# EAGLE board board (EAGLE 5.11)
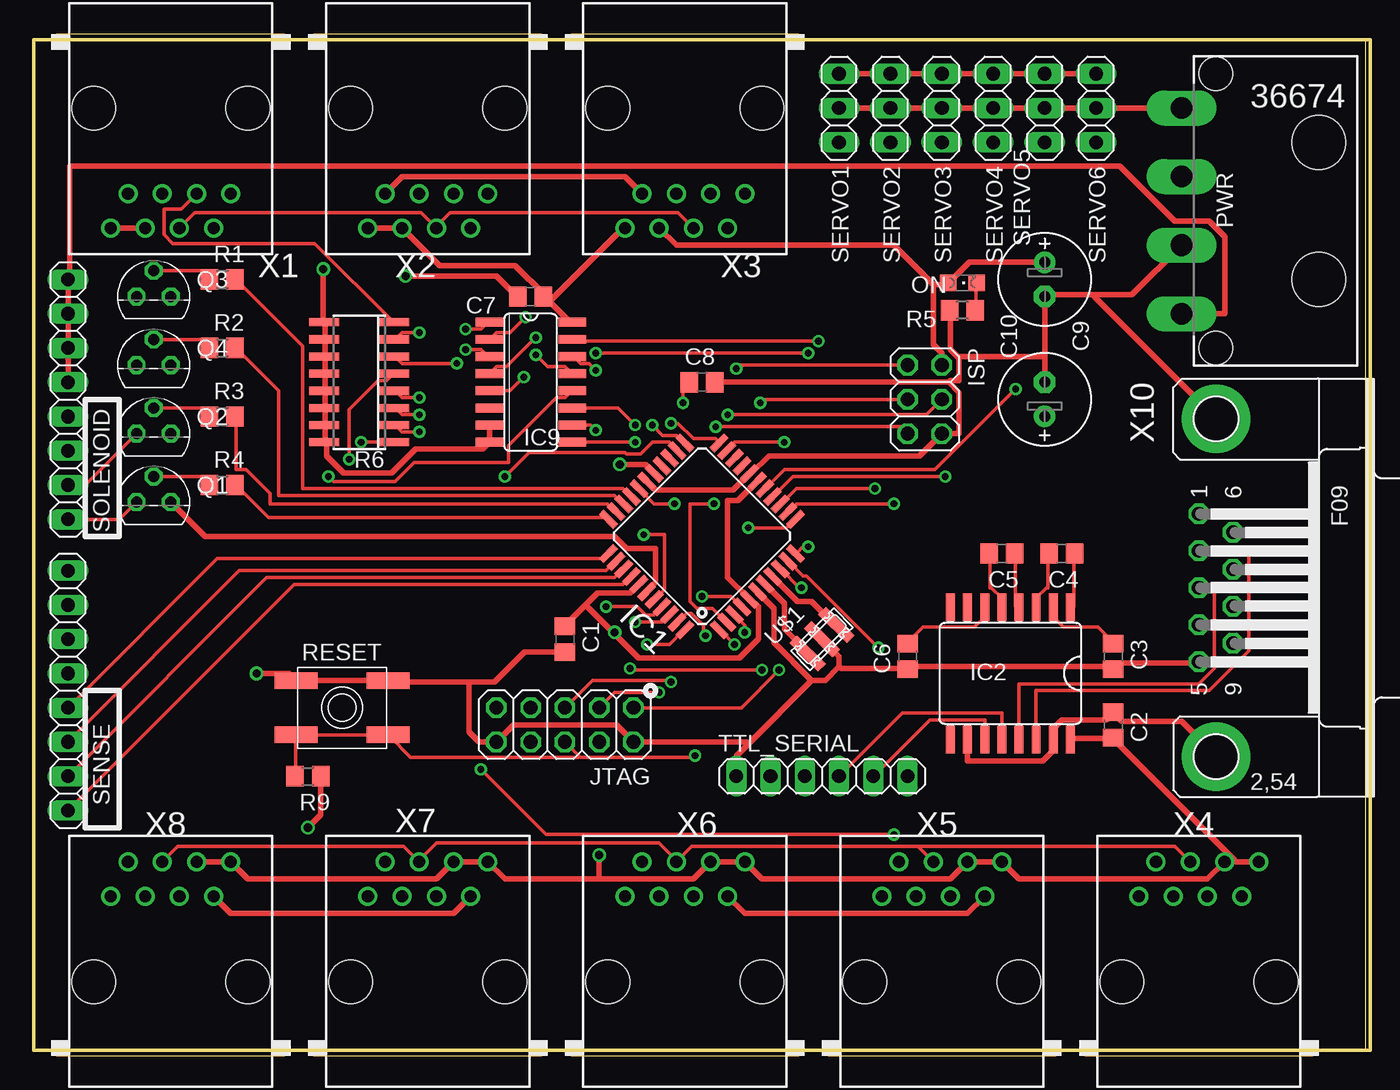
[diagram p0: board, top side]
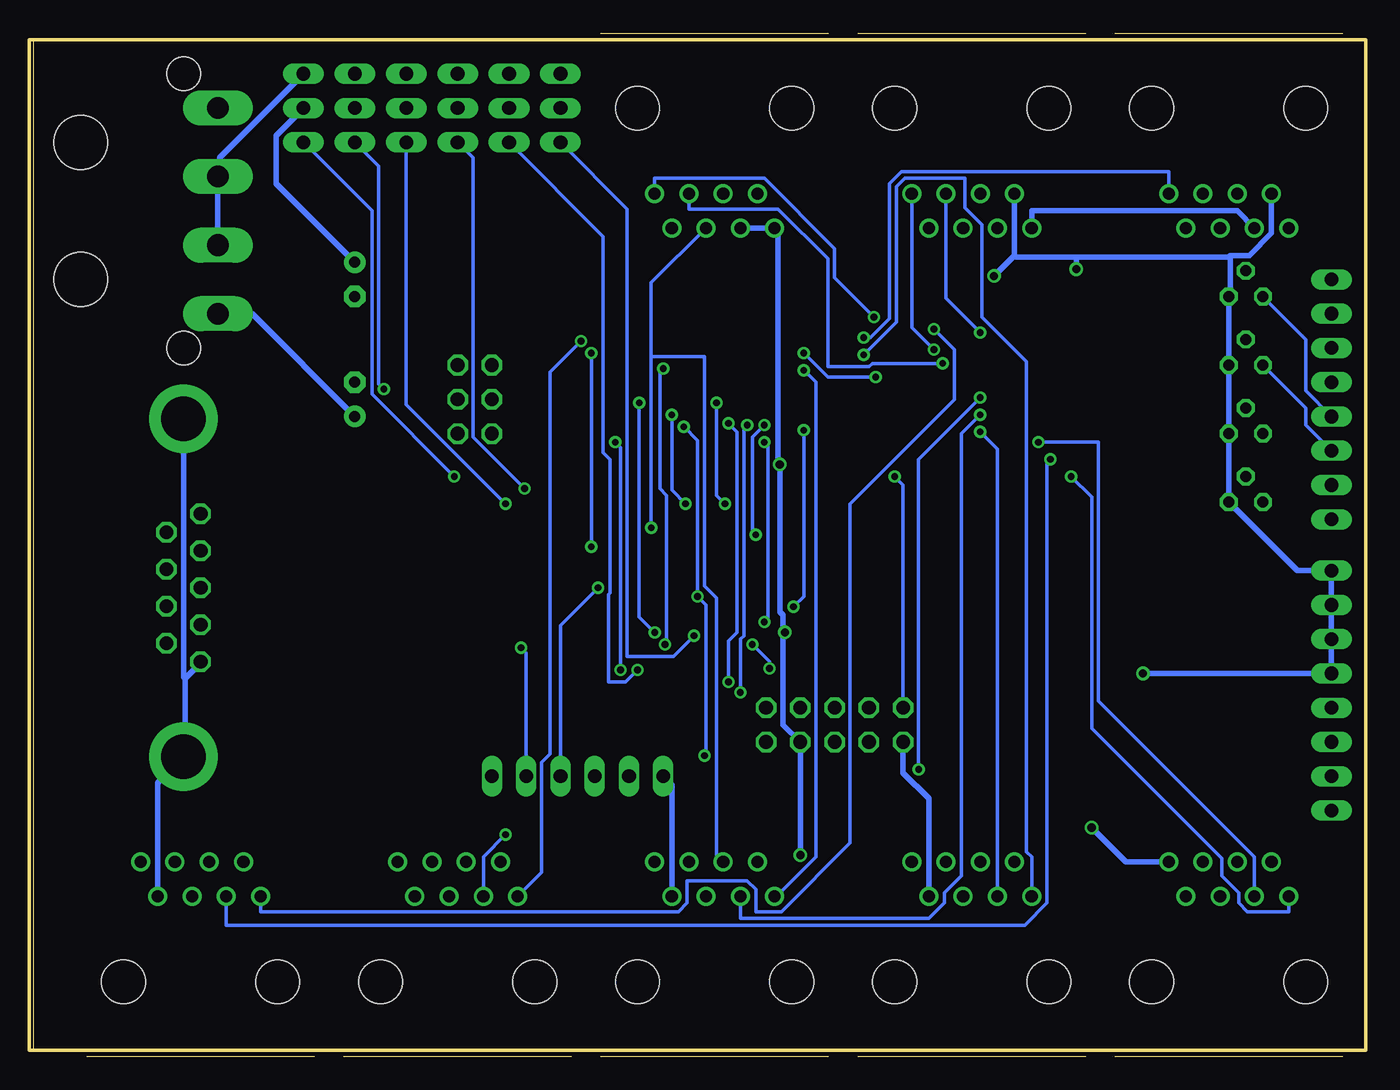
[diagram p1: board, bottom side, seen from below]

Size 98.73 x 74.92 mm. Coordinates in mm from the lower left corner, seen from the top.
Outline: 0,0 98.73,0 98.73,74.92 0,74.92 0,0
Copper layers (1*16): Top 0.035mm / dielectric 1.5mm / Bottom 0.035mm
Design rules "default *": minimum track width 8mil, minimum drill 16mil, track to track 1mil, track to pad 1mil, pad to pad 1mil, via to via 1mil, smd to smd 1mil, copper to edge 40mil, drill to drill 8mil, minimum pad ring 10mil, minimum via ring 8mil, stop-mask expansion 4mil, vias tented up to drill 0.61mm, thermal gap 10mil
Net classes: 0 default: width 0.254 mm, drill 0.5 mm, clearance 0.254 mm; 1 pwr12: width 0.406 mm, drill 0.6 mm, clearance 0.254 mm
vRestrict: area 22.4,44.5 to 23.1,54.4; area 24.9,44.5 to 25.9,54.4; area 34.8,44.5 to 35.8,54.6; area 37.8,44.5 to 38.9,54.6; area 42.9,37.3 to 50,44.5; area 43.2,31.8 to 50.3,38.6; area 48.8,31.8 to 55.9,38.9; area 49,37.3 to 55.9,44.5; area 67.3,30.2 to 77.7,31.5; area 67.3,23.9 to 77.7,25.4
Milling: 4 lines

## Footprints (pad centres in the part's own frame; a part is rotated, then mirrored left to right if it is on the bottom)
C0805 = smd 1.3 x 1.5: 1 -0.95,0; 2 0.95,0
E2,5-7 = drill 0.813 pad 1.6 round: + -1.27,0 | drill 0.813 pad 1.6 octagon: - 1.27,0
TQFP44 = smd 1.5 x 0.5: 1 -5.8,4; 2 -5.8,3.2; 3 -5.8,2.4; 4 -5.8,1.6; 5 -5.8,0.8; 6 -5.8,0; 7 -5.8,-0.8; 8 -5.8,-1.6; 9 -5.8,-2.4; 10 -5.8,-3.2; 11 -5.8,-4; 23 5.8,-4; 24 5.8,-3.2; 25 5.8,-2.4; 26 5.8,-1.6; 27 5.8,-0.8; 28 5.8,0; 29 5.8,0.8; 30 5.8,1.6; 31 5.8,2.4; 32 5.8,3.2; 33 5.8,4 | smd 0.5 x 1.5: 12 -4,-5.8; 13 -3.2,-5.8; 14 -2.4,-5.8; 15 -1.6,-5.8; 16 -0.8,-5.8; 17 0,-5.8; 18 0.8,-5.8; 19 1.6,-5.8; 20 2.4,-5.8; 21 3.2,-5.8; 22 4,-5.8; 34 4,5.8; 35 3.2,5.8; 36 2.4,5.8; 37 1.6,5.8; 38 0.8,5.8; 39 0,5.8; 40 -0.8,5.8; 41 -1.6,5.8; 42 -2.4,5.8; 43 -3.2,5.8; 44 -4,5.8
SO16L = smd 0.66 x 2.032: 1 -4.445,-4.902; 2 -3.175,-4.902; 3 -1.905,-4.902; 4 -0.635,-4.902; 5 0.635,-4.902; 6 1.905,-4.902; 7 3.175,-4.902; 8 4.445,-4.902; 9 4.445,4.902; 10 3.175,4.902; 11 1.905,4.902; 12 0.635,4.902; 13 -0.635,4.902; 14 -1.905,4.902; 15 -3.175,4.902; 16 -4.445,4.902
SO16 = smd 0.66 x 2.032: 1 -4.445,-3.073; 2 -3.175,-3.073; 3 -1.905,-3.073; 4 -0.635,-3.073; 5 0.635,-3.073; 6 1.905,-3.073; 7 3.175,-3.073; 8 4.445,-3.073; 9 4.445,3.073; 10 3.175,3.073; 11 1.905,3.073; 12 0.635,3.073; 13 -0.635,3.073; 14 -1.905,3.073; 15 -3.175,3.073; 16 -4.445,3.073
2X03 = drill 1.016 octagon: 1 -2.54,-1.27; 2 -2.54,1.27; 3 0,-1.27; 4 0,1.27; 5 2.54,-1.27; 6 2.54,1.27
2X05 = drill 1.016 octagon: 1 -5.08,-1.27; 2 -5.08,1.27; 3 -2.54,-1.27; 4 -2.54,1.27; 5 0,-1.27; 6 0,1.27; 7 2.54,-1.27; 8 2.54,1.27; 9 5.08,-1.27; 10 5.08,1.27
CHIPLED_0805 = smd 1.2 x 1.2: A 0,-1.05; C 0,1.05
9090-4R = drill 1.6 pad 2.6 long: 1 -7.62,-6.35; 2 -2.54,-6.35; 3 2.54,-6.35; 4 7.62,-6.35 | hole 4: -5.08,3.81; 5.08,3.81 | hole 2.5: -10.16,-3.81; 10.16,-3.81
TO92 = drill 0.813 octagon: 1 1.27,0; 2 0,1.905; 3 -1.27,0
R0805 = smd 1.3 x 1.5: 1 -0.95,0; 2 0.95,0
SO16' = smd 0.6 x 2.2: 1 -4.445,-2.6; 2 -3.175,-2.6; 3 -1.905,-2.6; 4 -0.635,-2.6; 5 0.635,-2.6; 6 1.905,-2.6; 7 3.175,-2.6; 8 4.445,-2.6; 9 4.445,2.6; 10 3.175,2.6; 11 1.905,2.6; 12 0.635,2.6; 13 -0.635,2.6; 14 -1.905,2.6; 15 -3.175,2.6; 16 -4.445,2.6
EVQ-Q2 = smd 3.2 x 1.2: A -3.4,-2; A' 3.4,-2; B -3.4,2; B' 3.4,2
1X08 = drill 1.016 long: 1 -8.89,0; 2 -6.35,0; 3 -3.81,0; 4 -1.27,0; 5 1.27,0; 6 3.81,0; 7 6.35,0; 8 8.89,0
1X03 = drill 1.016 long: 1 -2.54,0; 2 0,0; 3 2.54,0
1X06 = drill 1.016 long: 1 -6.35,0; 2 -3.81,0; 3 -1.27,0; 4 1.27,0; 5 3.81,0; 6 6.35,0
CSTCR-G = smd 0.8 x 3: 1 -1.5,0; 2 0,0; 3 1.5,0
RJ45-NO-SHIELD = drill 0.9 pad 1.4 round: 1 -4.445,6.35; 2 -3.175,8.89; 3 -1.905,6.35; 4 -0.635,8.89; 5 0.635,6.35; 6 1.905,8.89; 7 3.175,6.35; 8 4.445,8.89 | hole 3.251: -5.715,0; 5.715,0
F09HP = drill 1.016 octagon: 1 -5.486,-1.27; 2 -2.743,-1.27; 3 0,-1.27; 4 2.743,-1.27; 5 5.486,-1.27; 6 -4.115,1.27; 7 -1.372,1.27; 8 1.372,1.27; 9 4.115,1.27 | drill 3.302 pad 5.08 round: G1 -12.522,0; G2 12.522,0

## Placement (x,y rotation side)
C1  .1uF  [C0805]  39.37,30.48 270 top
C2  .1uF  [C0805]  80.01,24.13 90 top
C3  1uF  [C0805]  80.01,29.21 270 top
C4  1uF  [C0805]  76.2,36.83 180 top
C5  1uF  [C0805]  71.75,36.83 180 top
C6  1uF  [C0805]  64.77,29.21 90 top
C7  .1uF  [C0805]  36.83,55.88 180 top
C8  .1uF  [C0805]  49.53,49.53 0 top
C9  [E2,5-7]  74.93,57.15 270 top
C10  [E2,5-7]  74.93,48.26 90 top
IC1  MEGA164P/324P/644P-AU  [TQFP44]  49.53,38.1 135 top
IC2  MAX232ECWE  [SO16L]  72.39,27.94 180 top
IC9  74LS151D  [SO16]  36.83,49.53 270 top
ISP  [2X03]  66.04,48.26 270 top
JTAG  [2X05]  39.37,24.13 180 top
ON  [CHIPLED_0805]  68.83,56.9 270 top
PWR  9090-4R  [9090-4R]  91.44,62.23 270 top
Q1  BS170  [TO92]  8.89,40.64 0 top
Q2  BS170  [TO92]  8.89,45.72 0 top
Q3  BS170  [TO92]  8.89,55.88 0 top
Q4  BS170  [TO92]  8.89,50.8 0 top
R1  [R0805]  13.97,57.15 0 top
R2  [R0805]  13.97,52.07 0 top
R3  [R0805]  13.97,46.99 0 top
R4  [R0805]  13.97,41.91 0 top
R5  [R0805]  68.83,54.86 180 top
R6  [SO16']  24.13,49.53 90 top
R9  [R0805]  20.32,20.32 0 top
RESET  EVQQ2  [EVQ-Q2]  22.86,25.4 0 top
SENSE  [1X08]  2.54,26.67 90 top
SERVO1  [1X03]  59.69,69.85 90 top
SERVO2  [1X03]  63.5,69.85 90 top
SERVO3  [1X03]  67.31,69.85 90 top
SERVO4  [1X03]  71.12,69.85 90 top
SERVO5  [1X03]  74.93,69.85 90 top
SERVO6  [1X03]  78.74,69.85 90 top
SOLENOID  [1X08]  2.54,48.26 90 top
TTL_SERIAL  [1X06]  58.42,20.32 0 top
U$1  [CSTCR-G]  58.42,30.48 45 top
X1  RJ45-6L-B  [RJ45-NO-SHIELD]  10.16,69.85 180 top
X2  RJ45-6L-B  [RJ45-NO-SHIELD]  29.21,69.85 180 top
X3  RJ45-6L-B  [RJ45-NO-SHIELD]  48.26,69.85 180 top
X4  RJ45-6L-B  [RJ45-NO-SHIELD]  86.36,5.08 0 top
X5  RJ45-6L-B  [RJ45-NO-SHIELD]  67.31,5.08 0 top
X6  RJ45-6L-B  [RJ45-NO-SHIELD]  48.26,5.08 0 top
X7  RJ45-6L-B  [RJ45-NO-SHIELD]  29.21,5.08 0 top
X8  RJ45-6L-B  [RJ45-NO-SHIELD]  10.16,5.08 0 top
X10  [F09HP]  87.63,34.29 270 top

## Library data of the parts
C1-C10 R1-R5 R9 = rcl
IC1 = avr-5
IC2 = maxim; MF: MAXIM; MPN: MAX232ECWE+; OC_FARNELL: 9724435; OC_NEWARK: 67K4440
IC9 = 74xx-us
ISP JTAG SENSE SERVO1-SERVO6 SOLENOID TTL_SERIAL = pinhead
ON = led
PWR = con-thomas-betts; OC_FARNELL: unknown; OC_NEWARK: unknown
Q1-Q4 = Chris_parts
R6 = resistor-bourns; OC_FARNELL: unknown; OC_NEWARK: unknown
RESET U$1 = adafruit
X1-X8 = con-tycoelectronics; MPN: RJ45-6L-B; OC_FARNELL: unknown; OC_NEWARK: 16R6090
X10 = con-subd; OC_FARNELL: unknown; OC_NEWARK: unknown

## Nets
+5V [pwr12]: C1.1 C2.1 C7.1 C9.+ IC1.5 IC1.17 IC1.27 IC1.38 IC2.16 IC9.16 ISP.2 JTAG.4 ON.A PWR.1 R9.2 SERVO1.2 SERVO2.2 SERVO3.2 SERVO4.2 SERVO5.2 SERVO6.2 X1.6 X1.8 X2.6 X2.8 X3.6 X3.8 X4.6 X4.8 X5.6 X5.8 X6.6 X6.8 X7.6 X7.8 X8.6 X8.8
+12V [pwr12]: C10.+ PWR.4 SOLENOID.5 SOLENOID.6 SOLENOID.7 SOLENOID.8
EIA232RX1: IC2.13 X10.3
EIA232TX1: IC2.14 X10.2
GND [pwr12]: C1.2 C2.2 C3.2 C6.1 C7.2 C8.2 C9.- C10.- IC1.6 IC1.18 IC1.28 IC1.39 IC2.10 IC2.15 IC9.7 IC9.8 ISP.6 JTAG.2 JTAG.10 PWR.2 PWR.3 Q1.1 Q2.1 Q3.1 Q4.1 R5.2 R6.9 R6.10 R6.11 R6.12 R6.13 R6.14 R6.15 R6.16 RESET.B RESET.B' SENSE.5 SENSE.6 SENSE.7 SENSE.8 SERVO1.3 SERVO2.3 SERVO3.3 SERVO4.3 SERVO5.3 SERVO6.3 TTL_SERIAL.1 U$1.2 X1.7 X2.7 X3.7 X4.7 X5.7 X6.7 X7.7 X8.7 X10.5 X10.G1 X10.G2
LFSELA: IC1.40 IC9.11
LFSELB: IC1.41 IC9.10
LFSELC: IC1.42 IC9.9
MISO: IC1.1 ISP.1
MOSI: IC1.2 ISP.4
N$1: IC1.7 U$1.1
N$2: IC1.8 U$1.3
N$3: C4.2 IC2.3
N$4: C4.1 IC2.1
N$5: C5.1 IC2.4
N$6: C5.2 IC2.5
N$7: C3.1 IC2.2
N$8: C6.2 IC2.6
N$9: R6.8 X1.3
N$10: R6.5 X4.3
N$11: R6.7 X2.3
N$12: R6.4 X5.3
N$13: R6.6 X3.3
N$14: R6.3 X6.3
N$15: R6.2 X7.3
N$16: R6.1 X8.3
N$17: C8.1 IC1.29
N$18: IC1.30 R1.2
N$19: Q2.2 R3.1
N$20: Q4.2 R2.1
N$21: Q3.2 R1.1
N$22: Q1.3 SOLENOID.1
N$23: Q2.3 SOLENOID.2
N$24: Q3.3 SOLENOID.4
N$25: Q4.3 SOLENOID.3
N$26: IC1.31 R2.2
N$27: IC1.32 R3.2
N$28: IC1.33 R4.2
N$29: Q1.2 R4.1
N$30: IC1.37 SENSE.1
N$31: ON.C R5.1
N$32: IC1.36 SENSE.2
N$33: IC1.35 SENSE.3
N$34: IC1.34 SENSE.4
RST: IC1.4 ISP.5 JTAG.6 R9.1 RESET.A RESET.A'
RX0: IC1.9 IC2.12 TTL_SERIAL.4
RX1: IC1.11 IC9.5
RX1A: IC9.4 X1.1
RX1B: IC9.3 X2.1
RX1C: IC9.2 X3.1
RX1D: IC9.1 X4.1
RX1E: IC9.15 X5.1
RX1F: IC9.14 X6.1
RX1G: IC9.13 X7.1
RX1H: IC9.12 X8.1
SCK: IC1.3 ISP.3
SERVO1: IC1.43 SERVO1.1
SERVO2: IC1.44 SERVO2.1
SERVO3: IC1.14 SERVO3.1
SERVO4: IC1.13 SERVO4.1
SERVO5: IC1.16 SERVO5.1
SERVO6: IC1.15 SERVO6.1
TCK: IC1.21 JTAG.1
TDI: IC1.24 JTAG.9
TDO: IC1.23 JTAG.3
TMS: IC1.22 JTAG.5
TX0: IC1.10 IC2.11 TTL_SERIAL.5
TX1: IC1.12 X1.4 X2.4 X3.4 X4.4 X5.4 X6.4 X7.4 X8.4

## Tracks (layer width: path | path; a pad name or v marks a point on that pad's centre or on a via)
+5V  (via drill 0.6)
  Top 0.406: IC2.16 76.83,23.11 80.01,23.11 C2.1 80.14,22.99 89.03,14.1 89.03,13.97 | 89.03,13.97 X4.8 | 89.03,13.97 X4.6 87,12.7 73.03,12.7 X5.8 X5.6 67.94,12.7 53.98,12.7 X6.8 X6.6 48.9,12.7 41.91,12.7 | X8.6 X8.8 15.88,12.7 29.84,12.7 X7.6 X7.8 34.92,12.7 41.91,12.7 | C9.+ 69.34,58.42 67.82,56.9 ON.A 67.69,56.77 66.67,56.77 | ISP.2 67.31,51.69 66.67,52.32 66.67,56.77 | SERVO1.2 SERVO2.2 SERVO3.2 SERVO4.2 SERVO5.2 SERVO6.2 PWR.1 | 40.89,33.02 41.78,33.91 44.2,33.91 44.83,34.54 IC1.38 | 40.89,33.02 39.37,31.5 C1.1 | IC1.17 52.2,40.77 51.44,40.77 51.44,35.05 52.96,33.53 IC1.5 53.21,33.4 53.72,32.89 53.72,30.48 52.32,29.08 44.83,29.08 42.99,30.92 | 42.99,30.92 40.89,33.02 | X1.6 X1.8 | X2.8 X2.6 30.1,58.17 35.69,58.17 37.85,56.01 C7.1 | C7.1 37.85,55.88 39.75,53.98 IC9.16 | v43.43,43.43 45.34,43.43 45.97,42.8 IC1.27 | X3.8 43.69,60.96 38.35,55.63 C7.1 | v43.05,30.99 42.99,30.92 | X3.6 47.62,59.69 63.75,59.69 66.67,56.77 | 41.91,12.7 v41.91,14.48 | R9.2 21.27,17.46 v20.32,16.51
  Bottom 0.406: C9.+ 80.77,64.26 80.77,67.82 SERVO6.2 | X1.6 9.53,62.23 24.77,62.23 X2.8 | X3.6 X3.8 43.56,60.71 43.56,43.56 v43.43,43.43 43.43,32.51 43.18,32.26 43.18,30.99 | 43.18,30.99 43.18,24.13 JTAG.4 v41.91,14.48 | 43.18,30.99 v43.05,30.99 | v20.32,16.51 17.78,13.97 X8.8
+12V
  Top 0.406: SOLENOID.5 SOLENOID.6 SOLENOID.7 SOLENOID.8 2.67,57.28 2.67,65.53 80.52,65.53 84.58,61.47 87.12,61.47 88.27,60.33 88.27,54.61 PWR.4
  Bottom 0.406: C10.+ 82.55,54.61 PWR.4
EIA232RX1
  Top 0.254: X10.3 87.5,34.29 87.5,28.32 86.36,27.18 73.03,27.18 IC2.13
EIA232TX1
  Top 0.254: IC2.14 74.3,26.67 87.12,26.67 90.04,29.59 90.04,36.96 86.36,36.96 X10.2
GND  (via drill 0.6)
  Top 0.406: U$1.2 59.69,29.21 59.69,28.45 | 59.69,28.45 58.67,27.43 57.66,27.43 | 57.66,27.43 54.86,30.23 54.86,32.77 IC1.6 | v27.56,57.4 34.29,57.4 35.81,55.88 C7.2 | X3.7 43.81,64.77 27.3,64.77 X2.7 | IC9.7 33.78,46.35 33.78,45.09 IC9.8 33.66,44.96 33.27,44.58 28.32,44.58 26.54,42.8 22.99,42.8 21.72,44.07 21.72,44.96 R6.16 21.59,45.09 21.59,46.35 R6.15 21.59,46.48 21.59,47.62 R6.14 21.59,47.75 21.59,48.9 R6.13 21.59,49.02 21.59,50.16 R6.12 21.59,50.29 21.59,51.44 R6.11 21.59,51.56 21.59,52.7 R6.10 21.59,52.83 21.59,53.98 R6.9 21.46,54.1 v21.46,57.91 | SERVO1.3 SERVO2.3 SERVO3.3 SERVO4.3 SERVO5.3 SERVO6.3 | 74.93,51.44 C9.- 75.06,56.01 78.61,56.01 | 74.93,51.44 C10.- | IC1.28 45.47,42.16 46.1,41.53 51.82,41.53 52.96,42.67 IC1.18 53.21,42.8 54.48,44.07 65.66,44.07 ISP.6 68.58,45.72 68.58,48.77 67.82,49.53 | 67.82,49.53 C8.2 | 68.58,51.31 67.94,51.94 67.94,54.86 R5.2 | 68.58,51.31 68.58,49.66 67.94,49.66 67.82,49.53 | 74.93,51.44 68.71,51.44 68.58,51.31 | PWR.3 81.41,56.01 78.61,56.01 | X10.G1 87.63,46.86 78.61,55.88 78.61,56.01 | X8.7 14.61,10.16 31.11,10.16 X7.7 | IC2.10 69.22,21.46 74.8,21.46 75.56,22.23 IC2.15 75.56,23.88 76.2,24.51 79.5,24.51 80.01,25.02 C2.2 80.14,24.89 80.64,24.38 85.09,24.38 87.63,21.84 X10.G2 | X10.5 86.36,28.7 80.39,28.7 80.01,28.32 C3.2 79.88,28.45 64.9,28.45 C6.1 64.77,28.32 59.82,28.32 59.69,28.45 | X5.7 69.22,10.16 52.7,10.16 X6.7 | 52.96,22.73 52.07,21.84 TTL_SERIAL.1 | 52.96,22.73 57.66,27.43 | 52.96,22.73 52.83,22.86 JTAG.2 43.18,24.13 35.56,24.13 JTAG.10 33.02,22.86 32.26,23.62 32.26,27.3 | v16.51,27.94 18.92,27.94 RESET.B 19.56,27.43 26.16,27.43 RESET.B' 26.42,27.3 32.26,27.3
  Top 0.406: Q1.1 12.7,38.1 43.05,38.1 43.94,37.21 46.1,37.21 46.1,34.67 IC1.39 | 39.37,29.46 C1.2 36.39,29.53 34.16,27.3 32.26,27.3
  Bottom 0.406: 26.04,58.93 v27.56,57.4 | 26.04,58.93 X2.7 | X1.7 6.99,60.58 8.64,58.93 10.03,58.93 | 10.03,58.93 10.03,56.01 Q3.1 Q4.1 Q2.1 Q1.1 5.08,35.56 SENSE.8 SENSE.7 SENSE.6 SENSE.5 v16.51,27.94 | 21.46,58.8 10.16,58.8 10.03,58.93 | 21.46,58.8 25.91,58.8 26.04,58.93 | PWR.3 PWR.2 84.96,64.9 84.96,66.17 SERVO6.3 | X7.7 32.38,18.67 34.29,20.57 JTAG.10 | X4.7 89.53,19.81 87.63,21.72 X10.G2 87.5,21.84 87.5,27.56 | 87.5,27.56 86.36,28.7 X10.5 | X6.7 51.44,19.68 TTL_SERIAL.1 | X10.G1 87.63,27.69 87.5,27.56 | 21.46,58.8 v21.46,57.91
LFSELA  (via drill 0.5)
  Top 0.254: v45.21,38.23 46.74,38.23 46.74,34.16 46.1,33.53 IC1.40 | v44.58,46.35 43.31,47.62 IC9.11
  Bottom 0.254: v45.21,38.23 45.47,38.48 45.47,45.47 v44.58,46.35
LFSELB  (via drill 0.5)
  Top 0.254: v42.42,32.89 44.7,32.89 45.34,32.26 45.97,32.26 46.48,32.77 IC1.41 | v41.66,45.97 41.27,46.35 IC9.10
  Bottom 0.254: v42.42,32.89 41.66,33.66 v41.66,45.97
LFSELC  (via drill 0.5)
  Top 0.254: v44.58,31.75 46.61,31.75 47.12,32.26 IC1.42 | v44.58,45.09 IC9.9
  Bottom 0.254: v44.58,31.75 44.32,32 44.32,44.83 v44.58,45.09
MISO  (via drill 0.5)
  Top 0.254: v51.94,30.1 50.93,31.11 IC1.1 | v52.07,50.55 52.32,50.8 ISP.1
  Bottom 0.254: v51.94,30.1 51.82,30.23 51.82,41.15 52.32,41.66 52.32,50.29 v52.07,50.55
MOSI  (via drill 0.5)
  Top 0.254: v50.42,40.51 48.64,40.51 48.64,33.27 49.15,32.77 50.29,32.77 51.31,31.75 IC1.2 | v51.44,47.12 66.17,47.12 ISP.4
  Bottom 0.254: v50.42,40.51 51.44,41.53 v51.44,47.12
N$1
  Top 0.406: U$1.1 57.36,29.51 55.63,31.24 55.63,33.13 IC1.7
N$2
  Top 0.406: U$1.3 59.39,31.54 57.66,33.27 56.62,33.27 IC1.8
N$3
  Top 0.254: C4.2 75.18,36.83 75.18,34.29 75.06,34.29 74.3,33.53 IC2.3
N$4
  Top 0.254: C4.1 77.09,36.83 77.09,32.89 76.83,32.89 IC2.1
N$5
  Top 0.254: C5.1 72.77,36.83 72.77,32.89 73.03,32.89 IC2.4
N$6
  Top 0.254: C5.2 70.87,36.83 70.87,34.29 70.99,34.29 71.75,33.53 IC2.5
N$7
  Top 0.254: C3.1 80.01,30.23 78.87,31.37 76.33,31.37 75.56,32.13 IC2.2
N$8
  Top 0.254: C6.2 64.77,30.23 65.91,31.37 69.72,31.37 70.48,32.13 IC2.6
N$9
  Top 0.254: X1.3 10.92,62.36 9.65,62.36 9.65,60.45 10.29,59.82 20.83,59.82 26.67,53.98 R6.8
N$10  (via drill 0.5)
  Top 0.254: v23.37,43.81 23.37,47.5 25.53,49.66 26.16,49.66 26.67,50.16 R6.5
  Bottom 0.254: v23.37,43.81 23.62,43.56 23.62,10.92 25.27,9.27 84.45,9.27 X4.3
N$11  (via drill 0.5)
  Top 0.254: v28.57,53.21 27.3,53.21 26.8,52.7 R6.7
  Bottom 0.254: v28.57,53.21 31.11,55.75 X2.3
N$12  (via drill 0.5)
  Top 0.254: v28.57,48.39 27.3,48.39 26.8,48.9 R6.4 | v33.15,20.83 37.97,16 v63.75,16
  Bottom 0.254: v28.57,48.39 33.15,43.81 v33.15,20.83 | v63.75,16 65.41,14.35 X5.3
N$13  (via drill 0.5)
  Top 0.254: v31.37,50.93 27.3,50.93 26.8,51.44 R6.6
  Bottom 0.254: v31.37,50.93 36.58,50.93 36.83,50.67 39.88,50.67 39.88,58.67 43.56,62.36 50.16,62.36 X3.3
N$14  (via drill 0.5)
  Top 0.254: v28.57,47.12 27.3,47.12 26.8,47.62 R6.3
  Bottom 0.254: v28.57,47.12 29.97,45.72 29.97,12.95 31.24,11.68 31.24,10.92 32.38,9.78 46.35,9.78 X6.3
N$15  (via drill 0.5)
  Top 0.254: v28.57,45.85 27.3,45.85 26.8,46.35 R6.2
  Bottom 0.254: v28.57,45.85 27.3,44.58 X7.3
N$16  (via drill 0.5)
  Top 0.254: v24.26,45.09 R6.1
  Bottom 0.254: v24.26,45.09 19.81,45.09 19.81,25.91 8.26,14.35 X8.3
N$17  (via drill 0.5)
  Top 0.254: v47.5,40.51 45.97,40.51 44.96,41.53 IC1.29 | v48.13,48.01 48.13,49.53 C8.1
  Bottom 0.254: v47.5,40.51 48.13,41.15 v48.13,48.01
N$18
  Top 0.254: R1.2 14.99,57.15 19.94,52.2 19.94,41.66 43.69,41.66 44.2,41.15 IC1.30
N$19
  Top 0.254: Q2.2 12.32,47.62 12.95,46.99 R3.1
N$20
  Top 0.254: Q4.2 12.32,52.7 12.95,52.07 R2.1
N$21
  Top 0.254: Q3.2 12.32,57.78 12.95,57.15 R1.1
N$22
  Top 0.254: Q1.3 6.35,39.37 SOLENOID.1
N$23
  Top 0.254: Q2.3 3.81,41.91 SOLENOID.2
N$24
  Bottom 0.254: Q3.3 4.45,52.7 4.45,48.9 SOLENOID.4
N$25
  Bottom 0.254: Q4.3 4.45,47.62 4.45,46.35 SOLENOID.3
N$26
  Top 0.254: R2.2 14.99,52.07 18.16,48.9 18.16,41.15 43.05,41.15 43.69,40.51 IC1.31
N$27
  Top 0.254: R3.2 14.99,46.99 14.99,43.05 15.75,43.05 17.53,41.27 17.53,40.51 42.55,40.51 43.05,40.01 IC1.32
N$28
  Top 0.254: R4.2 14.99,41.91 17.4,39.5 42.55,39.5 IC1.33
N$29
  Top 0.254: Q1.2 12.32,42.55 12.95,41.91 R4.1
N$30
  Top 0.254: SENSE.1 19.3,34.54 43.69,34.54 44.2,35.05 IC1.37
N$31
  Top 0.254: ON.C 69.85,56.9 69.85,54.86 R5.1
N$32
  Top 0.254: IC1.36 43.69,35.69 43.05,35.05 17.27,35.05 SENSE.2
N$33
  Top 0.254: SENSE.3 15.24,35.56 42.42,35.56 43.05,36.2 IC1.35
N$34
  Top 0.254: IC1.34 42.55,36.7 42.29,36.45 13.59,36.45 SENSE.4
RST  (via drill 0.5)
  Top 0.254: R9.1 19.43,20.32 19.43,23.37 RESET.A 19.56,23.37 26.16,23.37 RESET.A' 26.29,23.37 27.94,21.72 40.39,21.72 40.45,21.78 | v49.53,33.66 51.69,33.66 52.45,32.89 IC1.4 | v49.02,21.84 48.9,21.72 40.51,21.72 40.45,21.78 | 40.45,21.78 JTAG.6 | ISP.5 64.26,46.23 v50.55,46.23
  Bottom 0.254: v49.02,21.84 48.9,21.97 48.9,33.02 v49.53,33.66 49.53,45.21 v50.55,46.23
RX0  (via drill 0.5)
  Top 0.254: v56.9,34.29 56.77,34.29 55.37,35.69 IC1.9 | TTL_SERIAL.4 64.39,25.02 71.75,25.02 IC2.12
  Bottom 0.254: v56.9,34.29 59.69,31.5 TTL_SERIAL.4
RX1  (via drill 0.5)
  Top 0.254: v57.4,37.34 57.02,37.34 56.52,36.83 IC1.11 | v41.66,51.69 v57.4,51.69 | v36.32,49.91 35.31,48.9 IC9.5
  Bottom 0.254: v57.4,51.69 v57.4,37.34 | v41.66,51.69 39.88,49.91 v36.32,49.91
RX1A  (via drill 0.5)
  Top 0.254: v37.21,52.83 35.05,50.67 34.29,50.67 33.78,50.16 IC9.4
  Bottom 0.254: v37.21,52.83 36.7,52.83 35.31,54.23 35.31,64.26 34.42,65.15 14.61,65.15 X1.1
RX1B  (via drill 0.5)
  Top 0.254: v32,51.94 33.15,51.94 33.66,51.44 IC9.3
  Bottom 0.254: v32,51.94 33.66,53.59 X2.1
RX1C  (via drill 0.5)
  Top 0.254: v36.45,54.36 35.31,53.21 34.29,53.21 33.78,52.7 IC9.2
  Bottom 0.254: v36.45,54.36 39.37,57.28 39.37,59.44 44.58,64.64 52.7,64.64 X3.1
RX1D  (via drill 0.5)
  Top 0.254: v32,53.47 33.15,53.47 33.66,53.98 IC9.1
  Bottom 0.254: v32,53.47 30.48,51.94 30.48,48.26 38.23,40.51 38.23,15.37 43.31,10.29 45.21,10.29 45.21,11.94 45.85,12.57 50.29,12.57 50.29,10.92 50.93,10.29 81.92,10.29 X4.1
RX1E  (via drill 0.5)
  Top 0.254: v58.17,52.58 40.13,52.58 40.01,52.7 IC9.15
  Bottom 0.254: v58.17,52.58 60.45,50.29 60.45,21.97 61.09,21.34 61.09,13.21 X5.1
RX1F  (via drill 0.5)
  Top 0.254: v41.66,50.42 41.15,50.93 40.51,50.93 40.01,51.44 IC9.14
  Bottom 0.254: v41.66,50.42 40.77,49.53 40.77,14.35 43.69,11.43 X6.1
RX1G  (via drill 0.5)
  Top 0.254: v37.21,51.56 38.1,50.67 39.37,50.67 39.88,50.16 IC9.13
  Bottom 0.254: v37.21,51.56 34.8,53.98 34.8,64.01 34.16,64.64 29.72,64.64 29.72,62.48 28.45,61.21 28.45,54.36 25.15,51.05 25.15,14.73 24.77,14.35 X7.1
RX1H  (via drill 0.5)
  Top 0.254: v21.84,42.55 22.23,42.16 26.8,42.16 28.19,43.56 35.18,43.56 35.18,44.83 38.73,48.39 39.37,48.39 39.88,48.9 IC9.12
  Bottom 0.254: v21.84,42.55 20.32,41.02 20.32,23.88 10.67,14.22 10.67,12.95 9.4,11.68 9.4,10.92 8.76,10.29 5.71,10.29 X8.1
SCK  (via drill 0.5)
  Top 0.254: v52.7,30.99 52.7,31.5 51.94,32.26 IC1.3 | v53.85,48.01 54.1,48.26 ISP.3
  Bottom 0.254: v52.7,30.99 53.85,32.13 v53.85,48.01
SERVO1  (via drill 0.5)
  Top 0.254: v49.78,30.73 49.66,30.73 49.66,31.5 48.77,32.38 48.39,32.38 47.75,31.75 IC1.43
  Bottom 0.254: v49.78,30.73 51.31,29.21 54.74,29.21 54.74,62.36 SERVO1.1
SERVO2  (via drill 0.5)
  Top 0.254: v45.47,30.1 47.12,30.1 48.13,31.11 IC1.44 | v44.2,28.32 44.32,28.19 v53.98,28.19
  Bottom 0.254: v45.47,30.1 44.2,28.83 v44.2,28.32 | v53.98,28.19 54.86,27.3 56.13,27.3 56.13,33.78 56.01,33.91 56.01,43.81 56.52,44.32 56.52,60.33 SERVO2.1
SERVO3  (via drill 0.5)
  Top 0.254: v62.36,41.66 56.52,41.66 55.37,40.51 IC1.14
  Bottom 0.254: v62.36,41.66 66.17,45.47 66.17,66.17 SERVO3.1
SERVO4  (via drill 0.5)
  Top 0.254: v63.75,40.51 56.52,40.51 56.01,40.01 IC1.13
  Bottom 0.254: v63.75,40.51 71.12,47.88 SERVO4.1
SERVO5  (via drill 0.5)
  Top 0.254: v72.77,49.02 66.8,43.05 55.63,43.05 54.23,41.66 IC1.16
  Bottom 0.254: v72.77,49.02 73.15,49.4 73.15,65.53 SERVO5.1
SERVO6  (via drill 0.5)
  Top 0.254: v67.56,42.55 56.26,42.55 54.86,41.15 IC1.15
  Bottom 0.254: v67.56,42.55 73.66,48.64 73.66,62.23 SERVO6.1
TCK  (via drill 0.5)
  Top 0.254: v55.63,45.09 51.94,45.09 51.44,44.58 IC1.21 | v55.24,28.19 52.45,25.4 JTAG.1
  Bottom 0.254: v55.63,45.09 55.24,44.7 v55.24,28.19
TDI  (via drill 0.5)
  Top 0.254: v34.92,42.55 36.7,44.32 43.81,44.32 43.94,44.2 44.96,44.2 45.85,45.09 47.12,45.09 47.62,44.58 IC1.24
  Bottom 0.254: v34.92,42.55 34.29,41.91 JTAG.9
TDO  (via drill 0.5)
  Top 0.254: v45.85,46.35 46.61,45.59 47.62,45.59 48.13,45.09 IC1.23 | v46.35,26.54 43.05,26.54 JTAG.3
  Bottom 0.254: v45.85,46.35 46.1,46.1 46.1,30.73 46.35,30.48 v46.35,26.54
TMS  (via drill 0.5)
  Top 0.254: v47.24,46.48 47.75,46.48 48.9,45.34 50.55,45.34 50.8,45.09 IC1.22 | v47.24,27.3 47.12,27.43 41.4,27.43 JTAG.5
  Bottom 0.254: v47.24,46.48 46.61,45.85 46.61,30.99 47.24,30.35 v47.24,27.3
TX0  (via drill 0.5)
  Top 0.254: v62.61,29.84 57.28,35.18 57.02,35.18 56.01,36.2 IC1.10 | TTL_SERIAL.5 66.42,24.51 70.48,24.51 IC2.11
  Bottom 0.254: v62.61,29.84 62.23,29.46 TTL_SERIAL.5
TX1  (via drill 0.5)
  Top 0.254: X1.4 11.94,62.1 28.7,62.1 X2.4 29.84,61.09 30.86,62.1 47.75,62.1 X3.4 | v52.96,38.73 55.75,38.73 56.39,39.37 IC1.12 | X8.4 10.67,15.11 27.43,15.11 X7.4 28.57,14.1 29.84,15.37 46.35,15.37 47.62,14.1 X6.4 48.77,15.11 65.53,15.11 65.6,15.05 | 65.6,15.05 X5.4 | X4.4 84.58,15.11 65.66,15.11 65.6,15.05
  Bottom 0.254: 52.96,51.44 52.96,56.9 X3.4 | 52.96,51.44 v52.96,38.73 | 52.96,51.44 49.02,51.44 49.02,34.42 48.13,33.53 48.13,14.48 X6.4

## Text on the board
tPlace: 36674